# Altium PCB xlr_ingang.PcbDoc
Units mm, origin at the board's own origin, x right, y up, seen from the top; angles counter-clockwise.
Board outline 35.68 x 117.8 mm, 2 copper layers (Top Layer, Bottom Layer); 55 components, 162 nets, 150 pads, 21 vias.
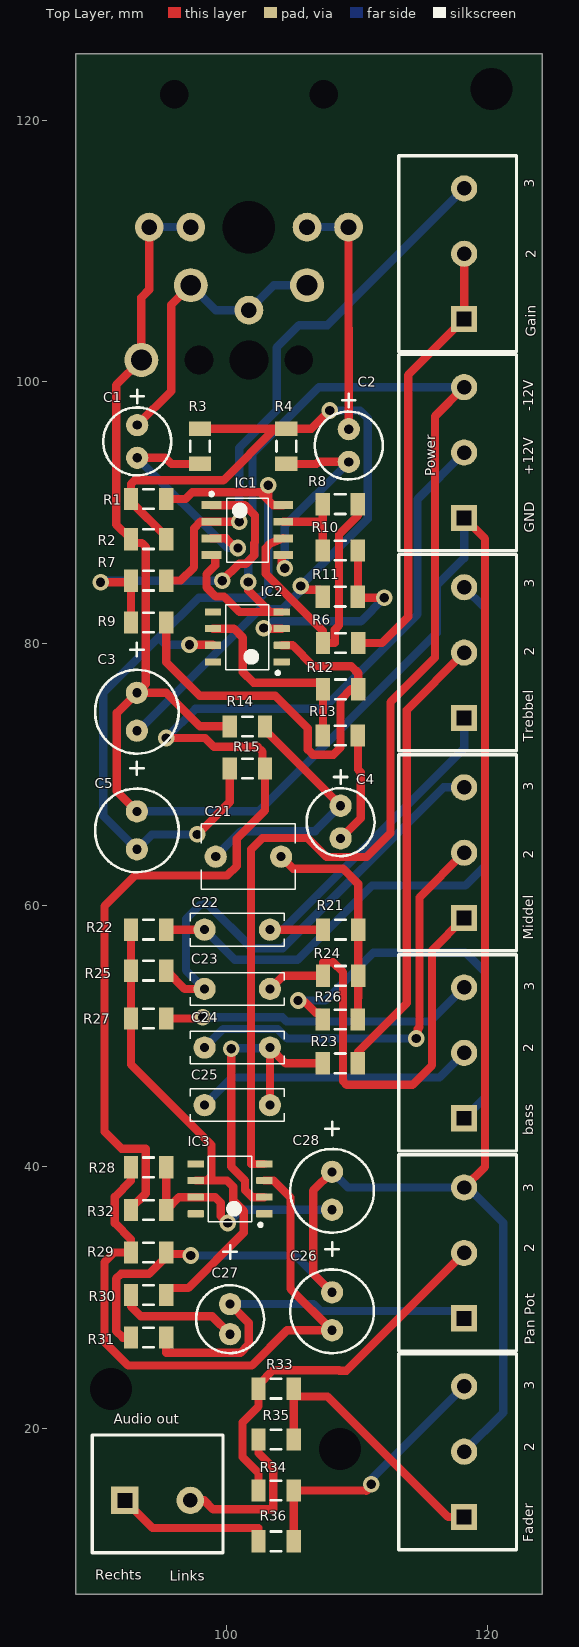
[diagram p0: Top Layer view]
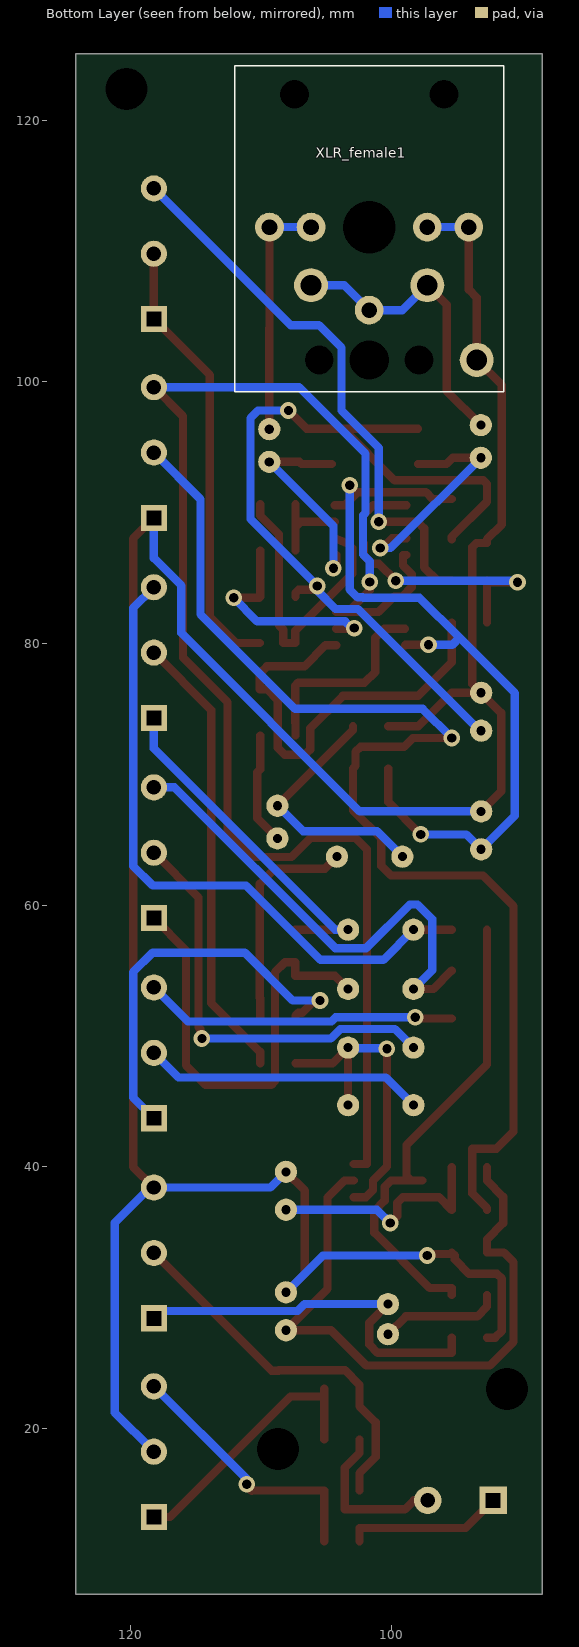
[diagram p1: Bottom Layer view, seen from below]

## Layer stack, top to bottom
Top Solder: solder mask 0.0102, Solder Resist, Dk 3.5
Top Layer: signal copper 0.0356
Dielectric 1: dielectric 0.32, FR-4, Dk 4.8
Bottom Layer: signal copper 0.0356
Bottom Solder: solder mask 0.0102, Solder Resist, Dk 3.5

## Board outline
88.5,7.3 124.175,7.3 124.175,125.095 88.5,125.095

## Design rules (kind name [scope] priority, off if disabled: settings)
Clearance [All] p1: gap=0.254 ignorepadtopadclearanceinfootprint=FALSE except(0: Arc-Hole Track-Hole SMDPad-Hole THPad-Hole Via-Hole Fill-Hole Poly-Hole Region-Hole Text-Hole)
Height [All] p1: minheight=0 maxheight=100 prefheight=12.7
HoleSize [All] p1: absolutevalues=TRUE maxlimit=5.08 minlimit=0.025 maxpercent=80.000 minpercent=20.000
PolygonConnect [All] p1: connectstyle=Relief reliefconductorwidth=0.254 reliefentries=4 polygonreliefangle="90 Angle" airgapwidth=0.254
RoutingVias [All] p1: holewidth=0.711 width=1.27 viastyle="Through Hole" minholewidth=0.711 minwidth=1.27 maxholewidth=0.711 maxwidth=1.27
SolderMaskExpansion [All] p1: expansion=0.102 istentingtop=FALSE
Width [All] p1: maxlimit=1.27 minlimit=0.254 preferedwidth=0.635 minimp=50.000000 maximp=50.000000 favimp=50.000000
28 further rules are at their usual default settings.

## Components (designator, comment, footprint, x,y, rotation, side; value= is the part's Value field where it differs from the comment)
"Audio out" "Header 2" HEADER_2 92.258,14.476 r0 top (schematic designator "PIN 19")
bass "RPot" HEADER_3 118.2,43.7 r90 top value=470K (schematic designator P8)
C1 "Cap Pol2" "CAPACITOR 10UF" 93.2,94.2 r90 top value=10uF
C2 "Cap Pol2" "CAPACITOR 10UF" 109.377,93.888 r90 top value=10uF
C3 "Cap Pol2" "CAPACITOR 100UF" 93.175,73.33 r90 top value=100uF
C4 "Cap Pol2" "CAPACITOR 10UF" 108.752,65.094 r90 top value=10uF
C5 "Cap Pol2" "CAPACITOR 100UF" 93.175,64.261 r90 top value=100uF
C21 "Cap" "CAPACITOR 1UF" 99.2,63.7 r0 top value=1uF
C22 "Cap" "CAPACITOR 22NF, 47NF, 100NF" 103.35,58.118 r180 top value=47nF
C23 "Cap" "CAPACITOR 22NF, 47NF, 100NF" 103.35,53.584 r180 top value=4n7F
C24 "Cap" "CAPACITOR 22NF, 47NF, 100NF" 98.35,49.1 r0 top value=22nF
C25 "Cap" "CAPACITOR 22NF, 47NF, 100NF" 98.35,44.7 r0 top value=4n7F
C26 "Cap Pol2" "CAPACITOR 100UF" 108.1,27.487 r90 top value=100uF
C27 "Cap Pol2" "CAPACITOR 4U7F" 100.3,27.187 r90 top value=4u7F
C28 "Cap Pol2" "CAPACITOR 100UF" 108.1,36.7 r90 top value=100uF
Fader "RPot" HEADER_3 118.2,13.2 r90 top value=10K (schematic designator P6)
Gain "RPot" HEADER_3 118.2,104.8 r90 top value=470K (schematic designator P13)
IC1 "LM833DR2G" OPAMP_LM833 101.625,88.675 r0 top locked
IC2 "TL061CD" OPAMP_TL061 101.625,80.502 r180 top
IC3 "TL061CD" OPAMP_TL061 100.3,38.3 r180 top
Middel "RPot" HEADER_3 118.2,59 r90 top value=100K (schematic designator P7)
"Pan Pot" "RPot" HEADER_3 118.2,28.4 r90 top value=47K (schematic designator P5)
Power "Header 3" HEADER_3 118.2,89.6 r90 top (schematic designator "PIN 18")
R1 "Res2" C1206 94.075,91.05 r0 top value=22k
R2 "Res2" C1206 94.075,87.973 r0 top value=22k
R3 "Res2" C1206 98,95.082 r270 top value=2k2
R4 "Res2" C1206 104.604,95.082 r90 top value=2k2
R6 "Res2" C1206 108.752,80.038 r0 top value=180
R7 "Res2" C1206 94.075,84.8 r180 top value=10K
R8 "Res2" C1206 108.727,90.65 r180 top value=10K
R9 "Res2" C1206 94.075,81.6 r180 top value=10K
R10 "Res2" C1206 108.727,87.113 r0 top value=10K
R11 "Res2" C1206 108.727,83.575 r0 top value=10K
R12 "Res2" C1206 108.752,76.501 r180 top value=10K
R13 "Res2" C1206 108.727,72.964 r0 top value=560
R14 "Res2" C1206 101.625,73.663 r0 top value=100K
R15 "Res2" C1206 101.625,70.448 r0 top value=100
R21 "Res2" C1206 108.752,58.118 r180 top value=12k
R22 "Res2" C1206 94.075,58.118 r180 top value=12k
R23 "Res2" C1206 108.727,47.9 r180 top value=12k
R24 "Res2" C1206 108.752,54.585 r180 top value=3k9
R25 "Res2" C1206 94.075,54.985 r180 top value=3k9
R26 "Res2" C1206 108.727,51.243 r180 top value=1k8
R27 "Res2" C1206 94.075,51.323 r180 top value=1K8
R28 "Res2" C1206 94.075,39.942 r0 top value=22k
R29 "Res2" C1206 94.075,33.434 r180 top value=22k
R30 "Res2" C1206 94.075,30.18 r180 top value=560
R31 "Res2" C1206 94.075,26.926 r0 top value=100
R32 "Res2" C1206 94.075,36.688 r180 top value=220
R33 "Res2" C1206 103.821,23.016 r0 top value=4k7
R34 "Res2" C1206 103.821,15.238 r0 top value=4k7
R35 "Res2" C1206 103.821,19.127 r180 top value=10K
R36 "Res2" C1206 103.821,11.349 r180 top value=10K
Trebbel "RPot" HEADER_3 118.2,74.3 r90 top value=100K (schematic designator P1)
XLR_female1 "XLR_female" XLR_FEMAIL_NEUTRIK_NCJ6FA-V 101.74,111.84 r180 bottom

## Footprints (in the part's own frame and the unit in brackets; to place one, negate y for a bottom-side part, rotate by r counter-clockwise, add the part's x,y. Pads: shape width x height; smd on the part's side, far side on the other; paste and mask are expansions set on the pad)
C1206 [mm] "Chip Capacitor, Body 3.2x1.6mm, IPC High Density"
  rect 1.1x1.7 smd: 1(-1.35,0) 2(1.35,0)
  silkscreen extent -0.4,-0.75 0.4,0.75, body extent -1.7,-0.9 1.7,0.9, height 1.3
"CAPACITOR 1UF" [mm]
  round 1.7 hole 0.7: 1(0,0) 2(5,0)
  silkscreen extent -1.1,-2.5 6.1,2.5
"CAPACITOR 4U7F" [mm]
  round 1.7 hole 0.7: 1(0,0) 2(2.3,0)
  silkscreen extent -1.45,-2.6 6.8,2.6
"CAPACITOR 10UF" [mm]
  round 1.7 hole 0.7: 1(0,0) 2(2.5,0)
  silkscreen extent -1.35,-2.6 5.21,2.6
"CAPACITOR 22NF, 47NF, 100NF" [mm]
  round 1.7 hole 0.7: 1(0,0) 2(5,0)
  silkscreen extent -1.1,-1.25 6.1,1.25
"CAPACITOR 100UF" [mm]
  round 1.7 hole 0.7: 1(0,0) 2(2.9,0)
  silkscreen extent -1.75,-3.2 6.71,3.2
HEADER_2 [mm]
  rect 2.1x2.1 hole 1.1 square: 1(0,0)
  round 2.1 hole 1.1: 2(5,0)
  silkscreen extent -2.5,-4 7.5,5, body extent -2.65,-4 7.5,4, height 10
HEADER_3 [mm]
  rect 2x2 hole 1.1 square: 1(0,0)
  round 2 hole 1.1: 2(5,0) 3(10,0)
  silkscreen extent -2.5,-4 12.5,5, body extent -2.65,-4 12.5,4, height 10
OPAMP_LM833 [mm] "SOIC, 8-Leads, Body 4.9x3.9mm, Pitch 1.27mm"
  rect 1.52x0.6 smd: 1(-2.74,1.905) 2(-2.74,0.635) 3(-2.74,-0.635) 4(-2.74,-1.905) 5(2.74,-1.905) 6(2.74,-0.635) 7(2.74,0.635) 8(2.74,1.905)
  silkscreen extent -2.86,-2.45 1.58,2.88, body extent -1.95,-2.45 1.95,2.45, height 1.75
OPAMP_TL061 [mm] "SOIC, 8-Leads, Body 5x4mm, Pitch 1.27mm, IPC High Density"
  rrect18% 1.25x0.55 smd: 1(-2.625,1.905) 2(-2.625,0.635) 3(-2.625,-0.635) 4(-2.625,-1.905) 5(2.625,-1.905) 6(2.625,-0.635) 7(2.625,0.635) 8(2.625,1.905)
  silkscreen extent -2.45,-2.48 1.65,2.88, body extent -3,-2.45 3,2.45, height 1.63
XLR_FEMAIL_NEUTRIK_NCJ6FA-V [mm]
  round 2.2 hole 1.2: 1(7.62,0) 2(-7.62,0) 3(0,-6.35) 4(4.445,0) 5(-4.445,0)
  round 2.6 hole 1.6: 1(8.225,-10.16) 6(-4.445,-4.445) 6(4.445,-4.445)
  round 0 hole 2.2 unplated: ""(-5.715,10.16) ""(-3.81,-10.16) ""(3.81,-10.16) ""(5.715,10.16)
  round 0 hole 3 unplated: ""(0,-10.16)
  round 0 hole 4 unplated: ""(0,0)
  silkscreen extent -10.29,-12.57 10.29,12.32, body extent -12.5,-14 12.5,16.12, height 32.85

## Part data
"Audio out": "Header, 2-Pin", LatestRevisionDate=17-Jul-2002, LatestRevisionNote="Re-released for DXP Platform.", Publisher="Altium Limited"
bass Gain "Pan Pot": library part RPot_1, "Potentiometer", LatestRevisionDate=17-Jul-2002, LatestRevisionNote="Re-released for DXP Platform.", PackageDescription="Variable Resistor, Thru-Hole; 3 Leads", PackageReference=VR5, Published=8-Jun-2000, Publisher="Altium Limited", Set Position=0.5, Sim Note="Enter the Resistance value and the set point into parameter fields."
C1 C2 C3 C4 C5 C26 C27 C28: "Polarized Capacitor (Axial)", LatestRevisionDate=17-Jul-2002, LatestRevisionNote="Re-released for DXP Platform.", PackageDescription="Polarized Capacitor; 2 Leads", PackageReference=POLAR0.8, Published=8-Jun-2000, Publisher="Altium Limited"
C21 C22 C23 C24 C25: "Capacitor", LatestRevisionDate=17-Jul-2002, LatestRevisionNote="Re-released for DXP Platform.", PackageDescription="Radial Cap, Thru-Hole; 2 Leads; 0.3 in Pin Spacing", PackageReference=RAD-0.3, Published=8-Jun-2000, Publisher="Altium Limited"
Fader Middel Trebbel: "Potentiometer", LatestRevisionDate=17-Jul-2002, LatestRevisionNote="Re-released for DXP Platform.", PackageDescription="Variable Resistor, Thru-Hole; 3 Leads", PackageReference=VR5, Published=8-Jun-2000, Publisher="Altium Limited", Set Position=0.5, Sim Note="Enter the Resistance value and the set point into parameter fields."
IC1: library part opamp_LM833, "Low Noise, Audio Dual Operational Amplifier, -40 to 85 degC, 8-Pin SOIC, Pb-Free, Tape and Reel", Manufacturer="On Semiconductor", ComponentLink1Description="Manufacturer URL", ComponentLink1URL=http://www.onsemi.com/, ComponentLink2Description=Datasheet, ComponentLink2URL=http://www.onsemi.cn/pub_link/Collateral/LM833-D.PDF, ComponentLink3Description="Package Specification", ComponentLink3URL=http://www.onsemi.com/pub_link/Collateral/751-07.PDF, DatasheetVersion="Rev. 6", GBW Typ (MHz)=15, Mounting Technology="Surface Mount", PackageDescription="8-Pin Small Outline Integrated Circuit, Body 4.9 x 3.9 mm, Pitch 1.27 mm", PackageReference=SOIC-8-751-07, PackageVersion="Rev. AK, 02/2011", Packing="Tape and Reel", PartNumber=LM833DR2G, RoHS=TRUE, SR Typ (V/uS)=7
IC2: library part opamp_L061, "Low-Power JFET-Input General-Purpose Operational Amplifier, 7 to 36 V, 0 to 70 degC, 8-pin SOIC (D8), Green (RoHS & no Sb/Br)", Manufacturer="Texas Instruments", Rating=Military, Total Supply Voltage(Max)(+5V is 5, +/-5V is 10)=36, Total Supply Voltage(Min)(+5V is 5, +/-5V is 10)=7, CMRR(Min)(dB)=70, Code_JEDEC=MS-012, ComponentLink1Description="Manufacturer URL", ComponentLink1URL=http://www.ti.com/, ComponentLink2Description=Datasheet, ComponentLink2URL=http://www.ti.com/lit/ds/symlink/tl061.pdf, ComponentLink3Description="Package Specification", ComponentLink3URL=http://www.ti.com/litv/pdf/msoi002j, DatasheetVersion=SLOS078J, Eco-Plan="Green (RoHS & no Sb/Br)", GBW(Typ)(MHz)=1, IIB(Max)(pA)=400, Iq per channel(Max)(mA)=0.25, Mounting Technology="Surface Mount", Number of Channels=1, Offset Drift(Typ)(uV/C)=10, PackageDescription="8-Pin Plastic Small Outline, Body 4.9 x 3.9 mm, Pitch 1.27 mm", PackageReference=D0008A, PackageVersion="4040047-3/M, 06/2011", PartNumber=TL061CD, Slew Rate(Typ)(V/us)=3.5, Sub Family="General Purpose Amplifier, High Supply Voltage Amplifier (>=30V), Low Power Amp (<=500uA)", Vio (25C)(Max)(mV)=15, Vn at 1kHz(Typ)(nV/rtHz)=42
IC3: library part opamp_TL061, "Low-Power JFET-Input General-Purpose Operational Amplifier, 7 to 36 V, 0 to 70 degC, 8-pin SOIC (D8), Green (RoHS & no Sb/Br)", Manufacturer="Texas Instruments", Rating=Military, Total Supply Voltage(Max)(+5V is 5, +/-5V is 10)=36, Total Supply Voltage(Min)(+5V is 5, +/-5V is 10)=7, CMRR(Min)(dB)=70, Code_JEDEC=MS-012, ComponentLink1Description="Manufacturer URL", ComponentLink1URL=http://www.ti.com/, ComponentLink2Description=Datasheet, ComponentLink2URL=http://www.ti.com/lit/ds/symlink/tl061.pdf, ComponentLink3Description="Package Specification", ComponentLink3URL=http://www.ti.com/litv/pdf/msoi002j, DatasheetVersion=SLOS078J, Eco-Plan="Green (RoHS & no Sb/Br)", GBW(Typ)(MHz)=1, IIB(Max)(pA)=400, Iq per channel(Max)(mA)=0.25, Mounting Technology="Surface Mount", Number of Channels=1, Offset Drift(Typ)(uV/C)=10, PackageDescription="8-Pin Plastic Small Outline, Body 4.9 x 3.9 mm, Pitch 1.27 mm", PackageReference=D0008A, PackageVersion="4040047-3/M, 06/2011", PartNumber=TL061CD, Slew Rate(Typ)(V/us)=3.5, Sub Family="General Purpose Amplifier, High Supply Voltage Amplifier (>=30V), Low Power Amp (<=500uA)", Vio (25C)(Max)(mV)=15, Vn at 1kHz(Typ)(nV/rtHz)=42
Power: "Header, 3-Pin", LatestRevisionDate=17-Jul-2002, LatestRevisionNote="Re-released for DXP Platform.", Publisher="Altium Limited"
R1 R2 R3 R4 R6 R7 R8 R9 R10 R11 R12 R13 R14 R15 R21 R22 R23 R24 R25 R26 R27 R28 R29 R30 R31 R32: "Resistor", LatestRevisionDate=17-Jul-2002, LatestRevisionNote="Re-released for DXP Platform.", PackageDescription="Axial Device, Thru-Hole; 2 Leads; 0.4 in Pin Spacing", PackageReference=AXIAL-0.4, Published=8-Jun-2000, Publisher="Altium Limited"
R33 R34: library part Res2_13, "Resistor", LatestRevisionDate=17-Jul-2002, LatestRevisionNote="Re-released for DXP Platform.", PackageDescription="Axial Device, Thru-Hole; 2 Leads; 0.4 in Pin Spacing", PackageReference=AXIAL-0.4, Published=8-Jun-2000, Publisher="Altium Limited"
R35 R36: library part Res2_3, "Resistor", LatestRevisionDate=17-Jul-2002, LatestRevisionNote="Re-released for DXP Platform.", PackageDescription="Axial Device, Thru-Hole; 2 Leads; 0.4 in Pin Spacing", PackageReference=AXIAL-0.4, Published=8-Jun-2000, Publisher="Altium Limited"

## Free pads (board coordinates)
  round 1.524 hole 3.2 unplated: 25(91.2,23) 25(108.7,18.4) 25(120.3,122.4)

## Via types
v1: diameter 1.27, hole 0.711, Top Layer to Bottom Layer, 21 vias

## Nets (pads, with @x,y where several pads share a name; then routed paths per layer and width w, separated by ;. In a path a pad name is that pad's centre, name@x,y a point inside that pad or via, vN(x,y) a via of type N, cw(c..) or ccw(c..) an arc to the next point about the centre after c; other vN are vias at no path point)
GND: "Pan Pot.3" C3.2 C5.2 C26.2 C28.2 Fader.2 Power.1 R2.1 R14.1 R29.1 R31.1 XLR_female1.1 XLR_female1.4 | length 218.6
  Top Layer w0.635: R31.1 92.725,26.924 92.1,26.924 91.592,27.432 91.592,31.429 91.964,31.801 94.101,31.801 95.193,32.893 95.193,33.201 R29.1 ; C5.2 91.643,68.693 91.643,74.698 C3.2 ; XLR_female1.1@94.12,111.84 94.12,107.056 93.515,106.451 93.515,101.68 91.592,99.757 91.592,89.105 R2.1 92.725,87.681 93.548,87.681 93.853,87.376 93.853,76.908 C3.2 ; R29.1@95.608,33.317 97.183,33.317 v1(97.3,33.2) ; R14.1 97.995,73.663 95.428,76.23 C3.2 ; C26.2 106.655,31.832 106.655,38.155 C28.2 ; 118.2,38.4 119.786,39.986 119.786,88.014 Power.1
  Bottom Layer w0.635: C5.2 102.461,67.161 116.1,80.8 116.1,84.422 118.2,86.522 Power.1 ; XLR_female1.1@94.12,111.84 XLR_female1.4 ; v1(97.3,33.2) 105.287,33.2 C26.2 ; C28.2 109.3,38.4 118.2,38.4 118.5,38.4 121.2,35.7 121.2,21.2 Fader.2
GND_Chasie: 
Net_1: 
Net_3: 
NetC1_1: C1.1 IC1.3 R3.2 | length 17.9
  Top Layer w0.635: C1.1 95.352,94.2 95.82,93.731 R3.2 ; IC1.3 100,88.04 100.74,87.3 v1(100.9,87.3)
  Bottom Layer w0.635: C1.1 100.1,87.3 v1(100.9,87.3)
NetC1_2: C1.2 XLR_female1.3 XLR_female1.6 | length 22.9
  Top Layer w0.635: C1.2 95.809,99.309 95.809,105.909 XLR_female1.6@97.295,107.395
  Bottom Layer w0.635: XLR_female1.6@97.295,107.395 99.2,105.49 XLR_female1.3 103.645,107.395 XLR_female1.6@106.185,107.395
NetC2_1: C2.1 IC1.5 R4.1 | length 16.2
  Top Layer w0.635: IC1.5 104.242,86.77 104.242,85.979 v1(104.471,85.75) ; R4.1 106.909,93.732 107.065,93.888 C2.1
  Bottom Layer w0.635: v1(104.471,85.75) 104.471,88.982 C2.1
NetC2_2: C2.2 XLR_female1.2 XLR_female1.5 | length 18.6
  Top Layer w0.635: XLR_female1.2 109.36,104.106 109.377,104.089 C2.2
  Bottom Layer w0.635: XLR_female1.5 XLR_female1.2
NetC3_1: C3.1 R1.1 R2.2 R3.1 R4.2 R11.1 | length 66.2
  Top Layer w0.635: R2.2 95.425,88.138 92.725,90.838 R1.1 92.725,92.202 93.004,92.481 99.783,92.481 103.734,96.432 ; R3.1 101.295,96.432 103.734,96.432 ; v1(105.7,84.4) 105.872,84.4 106.163,84.108 107.145,84.108 107.377,83.875 R11.1 ; v1(107.911,97.815) 106.528,96.432 R4.2 103.734,96.432
  Bottom Layer w0.635: C3.1 93.293,73.33 102.603,82.64 104.306,82.64 105.7,84.034 v1(105.7,84.4) 110.82,89.52 110.82,97.231 110.236,97.815 v1(107.911,97.815)
NetC4_1: C4.1 R13.2 | length 8.6
  Top Layer w0.635: C4.1 110.287,66.629 110.287,70.155 110.077,70.365 R13.2
NetC4_2: C4.2 C21.1 R14.2 | length 19.6
  Top Layer w0.635: R14.2 102.975,73.371 C4.2
  Bottom Layer w0.635: C21.1 101.147,65.647 106.805,65.647 C4.2
NetC5_1: C5.1 IC1.8 IC2.7 R1.2 R15.1 | length 63.2
  Top Layer w0.635: R1.2 96.892,91.05 97.409,91.567 102.591,91.567 103.226,90.932 ; v1(97.2,79.9) 98.966,79.9 IC2.7 ; v1(97.8,65.4) 100.275,67.875 R15.1 ; v1(103.226,92.104) 103.226,90.932 ; IC1.8 103.578,90.58 103.226,90.932
  Bottom Layer w0.635: v1(97.2,79.9) 95.385,79.9 94.844,80.442 ; v1(97.8,65.4) 94.314,65.4 C5.1 90.6,66.836 90.6,76.198 94.844,80.442 ; v1(103.226,92.104) 103.226,84.138 102.616,83.529 102.235,83.529 102.2,83.494 97.895,83.494 94.844,80.442
NetC21_2: C21.2 R21.1 R24.1 R26.1 | length 17.2
  Top Layer w0.635: C21.2 105.117,62.783 108.939,62.783 110.102,61.62 R21.1 R24.1 110.102,52.908 110.077,52.883 R26.1
NetC22_1: C22.1 R21.2 Trebbel.1 | length 27
  Top Layer w0.635: C22.1 R21.2
  Bottom Layer w0.635: C22.1 104.346,58.118 118.2,71.972 Trebbel.1
NetC22_2: C22.2 R22.1 Trebbel.3 | length 50.3
  Top Layer w0.635: R22.1 C22.2
  Bottom Layer w0.635: C22.2 100.661,55.808 105.464,55.808 111.149,61.493 118.288,61.493 119.786,62.992 119.786,82.714 Trebbel.3
NetC23_1: C23.1 Middel.1 R24.2 | length 35.5
  Top Layer w0.635: C23.1 104.351,54.585 R24.2 107.402,55.626 108.179,55.626 108.941,54.864 108.941,46.533 109.22,46.253 114.249,46.253 115.739,47.744 115.739,56.539 Middel.1
NetC23_2: C23.2 Middel.3 R25.1 | length 37.7
  Top Layer w0.635: R25.1 96.825,53.584 C23.2
  Bottom Layer w0.635: C23.2 96.926,55.008 96.926,58.928 98.044,60.046 98.628,60.046 101.977,56.697 104.322,56.697 116.625,69 Middel.3
NetC24_1: C24.1 Middel.2 | length 32.8
  Top Layer w0.635: v1(114.529,49.793) 114.65,49.915 114.65,50.515 114.783,50.648 114.783,60.583 Middel.2
  Bottom Layer w0.635: C24.1 99.772,50.521 103.939,50.521 104.667,49.793 v1(114.529,49.793)
NetC24_2: C24.2 C25.2 IC3.2 R23.2 | length 24.9
  Top Layer w0.635: v1(100.381,49.007) 100.381,40.005 101.448,38.938 101.448,38.198 101.981,37.665 IC3.2 ; C25.2 C24.2 104.55,47.9 R23.2
  Bottom Layer w0.635: v1(100.381,49.007) 100.427,49.054 103.304,49.054 C24.2
NetC25_1: bass.2 C25.1 | length 21.5
  Bottom Layer w0.635: C25.1 100.462,46.812 116.312,46.812 bass.2
NetC26_1: C26.1 IC3.3 R28.1 R29.2 | length 49.2
  Top Layer w0.635: R28.1 92.725,38.928 91.491,37.694 91.491,35.677 92.725,34.442 R29.2 92.725,33.426 91.44,33.426 90.703,32.69 90.703,26.597 92.51,24.79 101.962,24.79 104.658,27.487 C26.1 104.927,30.659 104.927,37.64 103.632,38.935 IC3.3
NetC27_1: C27.1 R30.2 | length 9.3
  Top Layer w0.635: R30.2 92.725,29.297 93.472,28.55 98.937,28.55 C27.1
NetC27_2: "Pan Pot.1" C27.2 R31.2 | length 30.1
  Top Layer w0.635: R31.2 95.425,25.756 101.092,25.756 101.727,26.391 101.727,28.06 C27.2
  Bottom Layer w0.635: C27.2 106.68,29.487 107.211,28.956 118.2,28.956 118.2,28.4
NetC28_1: C28.1 IC3.7 R28.2 R32.1 | length 18.2
  Top Layer w0.635: R28.2 R32.1 96.402,37.665 IC3.7 99.162,37.665 99.586,37.241 99.586,36.225 v1(100.127,35.684)
  Bottom Layer w0.635: v1(100.127,35.684) 101.143,36.7 C28.1
NetC31_1: 
NetC31_2: 
NetC34_1: 
NetC34_2: 
NetC35_1: 
NetC35_2: 
NetC36_2: 
NetC40_1: 
NetC40_2: 
NetC43_1: 
NetC43_2: 
NetC44_1: 
NetC44_2: 
NetC45_2: 
NetC51_1: 
NetC51_2: 
NetC52_2: 
NetC53_1: 
NetC53_2: 
NetC54_1: 
NetC54_2: 
NetC55_1: 
NetC55_2: 
NetC56_1: 
NetC57_1: 
NetC58_1: 
NetC58_2: 
NetC59_1: 
NetC60_1: 
NetC60_2: 
NetC61_2: 
NetC62_1: 
NetC62_2: 
NetC63_1: 
NetC63_2: 
NetC64_1: 
NetC64_2: 
NetC65_1: 
NetC66_1: 
NetC67_1: 
NetC67_2: 
NetC68_1: 
NetC71_1: 
NetC72_2: 
NetC81_1: 
NetC81_2: 
NetC83_1: 
NetC83_2: 
NetD1_2: 
NetD3_2: 
NetD5_1: 
NetD7_2: 
NetD8_2: 
NetD9_2: 
NetD10_2: 
NetD11_1: 
NetD12_2: 
NetD14_2: 
NetD15_2: 
NetD16_2: 
NetD17_2: 
NetF1_1: 
NetF1_2: 
NetIC1_1: IC1.1 R7.2 R9.2 | length 24.9
  Top Layer w0.635: v1(90.399,84.684) R7.2@92.725,84.684 ; R9.2 92.725,83.185 R7.2@92.725,84.684 ; R7.2 R7.2@92.725,84.684 ; IC1.1 101.426,90.58 102.207,89.8 102.207,87.737 102.144,87.675 102.138,86.732 101.5,86.093 100.993,86.093 v1(99.7,84.8)
  Bottom Layer w0.635: v1(90.399,84.684) 90.515,84.8 v1(99.7,84.8)
NetIC1_2: Gain.3 IC1.2 R7.1 | length 43.1
  Top Layer w0.635: R7.1 95.425,84.811 96.52,84.811 97.536,85.827 97.536,88.802 98.044,89.31 IC1.2 98.895,89.3 v1(101,89.3)
  Bottom Layer w0.635: v1(101,89.3) 101,94.955 103.861,97.815 103.861,102.616 105.588,104.343 107.743,104.343 Gain.3
NetIC1_6: IC1.6 R6.1 R8.1 | length 22.9
  Top Layer w0.635: IC1.6 103.368,87.642 103.033,87.307 103.024,85.869 103.024,85.343 103.208,85.158 107.402,80.964 R6.1 108.306,80.038 108.306,81.051 108.636,81.382 108.636,88.348 110.077,89.789 R8.1
NetIC1_7: IC1.7 R8.2 R10.1 | length 6.7
  Top Layer w0.635: IC1.7 106.967,89.31 107.377,88.9 ; R10.1 107.377,88.875 107.377,88.9 ; R8.2 107.377,88.9
NetIC2_2: IC2.2 R9.1 R12.1 | length 33.8
  Top Layer w0.635: R9.1 95.425,78.565 97.99,76 103.756,76 106.248,73.508 106.248,71.882 106.629,71.501 108.204,71.501 108.737,72.034 108.737,75.692 109.55,76.505 R12.1@110.102,76.505 ; IC2.2 105.071,79.866 106.68,78.257 109.569,78.257 110.102,77.724 R12.1@110.102,76.505 ; R12.1 R12.1@110.102,76.505
NetIC2_3: IC2.3 R10.2 R11.2 | length 17.1
  Top Layer w0.635: v1(102.887,81.178) 102.928,81.136 IC2.3 ; R10.2 R11.2 110.152,83.5 v1(112.1,83.5)
  Bottom Layer w0.635: v1(102.887,81.178) 103.054,81.178 103.576,81.7 110.3,81.7 v1(112.1,83.5)
NetIC2_6: IC2.6 R12.2 R13.1 | length 15.5
  Top Layer w0.635: IC2.6 100.584,81.136 101.27,80.451 101.27,77.826 102.095,77 107.17,77 107.402,76.767 R12.2 ; R13.1 107.402,74.726 R12.2@107.402,76.479
NetIC3_6: IC3.6 R22.2 R25.2 R27.2 R30.1 | length 37
  Top Layer w0.635: R22.2 R25.2 R27.2 92.725,47.813 98.882,41.656 98.882,39.265 98.552,38.935 ; R30.1 95.425,30.712 97.108,30.712 101.346,34.95 101.346,36.597 100.553,37.39 100.553,38.452 100.07,38.935 98.552,38.935 ; IC3.6 98.552,38.935
NetIC4_1: 
NetIC4_2: 
NetIC4_6: 
NetIC4_7: 
NetIC5_5: 
NetIC6_6: 
NetIC7_6: 
NetIC8_1: 
NetIC8_2: 
NetIC8_6: 
NetIC8_7: 
NetIC9_5: 
NetIC11_1: 
NetIC11_2: 
NetIC11_4: 
NetIC11_5: 
NetIC11_7: 
NetIC11_9: 
NetIC11_11: 
NetIC11_13: 
NetIC11_14: 
NetIC12_1: 
NetIC12_2: 
NetIC12_4: 
NetIC12_5: 
NetIC12_7: 
NetIC12_9: 
NetIC12_11: 
NetIC12_13: 
NetIC12_14: 
NetP1_2: R23.1 Trebbel.2 | length 34.8
  Top Layer w0.635: R23.1 110.077,48.774 113.817,52.514 113.817,74.917 Trebbel.2
NetP2_1_2: 
NetP2_1_5: 
NetP2_3_1: 
NetP2_3_3: 
NetP2_3_4: 
NetP2_3_6: 
NetP2_4_2: 
NetP2_4_5: 
NetP4_1: 
NetP4_2: 
NetP5_2: "Pan Pot.2" R33.1 R34.1 | length 29
  Top Layer w0.635: R34.1 102.471,16.561 101.244,17.788 101.244,20.447 102.471,21.674 R33.1 102.471,23.317 103.592,24.438 108.636,24.438 108.674,24.4 109.2,24.4 118.2,33.4
NetP6_1: Fader.1 R33.2 R35.1 | length 20.7
  Top Layer w0.635: R35.1 R33.2@105.171,22.428 ; R33.2 R33.2@105.171,22.428 ; Fader.1 116.975,13.2 107.747,22.428 R33.2@105.171,22.428
NetP6_3: Fader.3 R34.2 R36.1 | length 20.5
  Top Layer w0.635: R36.1 R34.2 106.529,15.238 110.719,15.215 111.1,15.596 v1(111.1,15.7)
  Bottom Layer w0.635: v1(111.1,15.7) 111.1,16.1 Fader.3
NetP8_1: bass.1 R26.2 | length 30.9
  Top Layer w0.635: v1(105.5,52.7) 105.622,52.578 106.042,52.578 106.845,51.776 107.145,51.776 107.377,51.543 R26.2
  Bottom Layer w0.635: v1(105.5,52.7) 107.589,52.7 111.252,56.363 118.288,56.363 119.786,54.864 119.786,45.286 bass.1
NetP8_3: bass.3 R27.1 | length 24
  Top Layer w0.635: R27.1 98.123,51.323 v1(98.21,51.41)
  Bottom Layer w0.635: v1(98.21,51.41) 104.307,51.41 104.615,51.103 115.603,51.103 bass.3
NetP13_1: Gain.1 Gain.2 R6.2 | length 34.2
  Top Layer w0.635: R6.2 110.102,80.035 111.912,80.035 113.919,82.042 113.919,100.519 Gain.1 Gain.2
"NetPIN 14_1": 
"NetPIN 14_2": 
"NetPIN 14_3": 
"NetPIN 14_4": 
"NetPIN 14_5": 
"NetPIN 14_6": 
"NetPIN 15_1": 
"NetPIN 15_2": 
"NetPIN 15_3": 
"NetPIN 15_4": 
"NetPIN 15_5": 
"NetPIN 15_6": 
"NetPIN 17_1": 
"NetPIN 17_2": 
"NetPIN 19_1": "Audio out.1" R36.2 | length 12.1
  Top Layer w0.635: 92.258,14.476 94.365,12.37 102.471,12.37 R36.2
"NetPIN 19_2": "Audio out.2" R35.2 | length 12.4
  Top Layer w0.635: 97.258,14.476 98.325,14.476 99.009,13.792 103.607,13.792 103.607,16.967 102.471,18.103 R35.2
NetR58_2: 
NetR105_2: 
VCC: Power.2 R15.2 R32.2 | length 92
  Top Layer w0.635: R32.2 92.725,36.82 93.853,37.948 93.853,41.377 91.999,41.377 90.703,42.672 90.703,59.919 93.04,62.255 100.076,62.255 100.813,62.992 100.813,65.075 102.975,67.237 R15.2 102.778,70.645 102.778,71.728 102.406,72.1 99.071,72.1 98.399,72.772 v1(95.416,72.772)
  Bottom Layer w0.635: v1(95.416,72.772) 97.645,75 107.4,75 114.63,82.23 114.63,91.03 Power.2
VEE: IC1.4 IC2.4 IC3.4 Power.3 | length 114.8
  Top Layer w0.635: IC1.4 99.156,86.77 99.156,85.962 98.494,85.3 98.494,84.3 99.2,83.594 99.831,83.594 101.018,82.406 103.344,82.406 ; v1(101.7,84.7) 101.7,84.05 103.344,82.406 ; IC3.4 101.905,40.205 101.905,64.262 102.768,65.126 106.223,65.126 107.676,63.672 110.744,63.672 112.573,65.501 112.573,75.514 115.976,78.918 115.976,97.376 Power.3 ; IC2.4 103.344,82.406
  Bottom Layer w0.635: v1(101.7,84.7) 101.7,86.294 102.207,86.8 102.207,89.8 102.019,89.987 102.019,94.52 107.1,99.6 Power.3
pads on no net: IC2.1 IC2.5 IC2.8 IC3.1 IC3.5 IC3.8 XLR_female1.

## Silkscreen, mask and mechanical layers (free items; w line width, h text height)
Top Overlay:
  text "3" at 123.573,114.846 h0.76 r90
  text "2" at 123.673,109.446 h0.76 r90
  text "-12V" at 123.473,97.767 h0.76 r90
  text "+12V" at 123.473,92.867 h0.76 r90
  text "GND" at 123.573,88.484 h0.76 r90
  text "3" at 123.573,84.246 h0.76 r90
  text "2" at 123.573,79.046 h0.76 r90
  text "3" at 123.473,68.746 h0.76 r90
  text "2" at 123.473,63.546 h0.76 r90
  text "3" at 123.573,53.446 h0.76 r90
  text "2" at 123.473,48.746 h0.76 r90
  text "3" at 123.473,38.046 h0.76 r90
  text "2" at 123.573,33.446 h0.76 r90
  text "3" at 123.573,22.946 h0.76 r90
  text "2" at 123.573,18.246 h0.76 r90
  text "Rechts" at 90.005,8.427 h0.76
  text "Links" at 95.686,8.327 h0.76